# Altium PCB Time4CM4_Module.PcbDoc
Units mil, origin at the board's own origin, x right, y up, seen from the top; angles counter-clockwise.
Board outline 511.81 x 590.55 mil, 4 copper layers (Top Layer, Int1 (GND), Int2 (PWR), Bottom Layer), stack 61.418 mil thick; 2 components, 10 nets, 28 pads, 0 vias.
Unrouted connection lines stored in the file: 9.
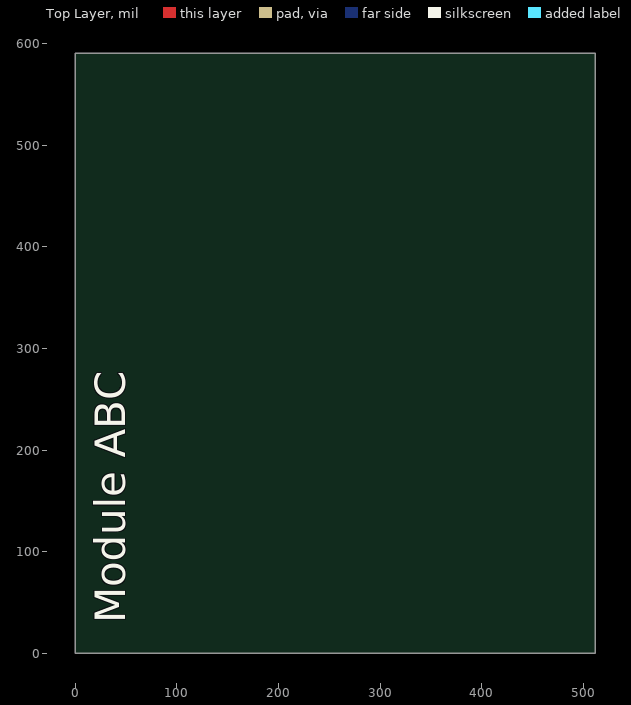
[diagram p0: Top Layer view]
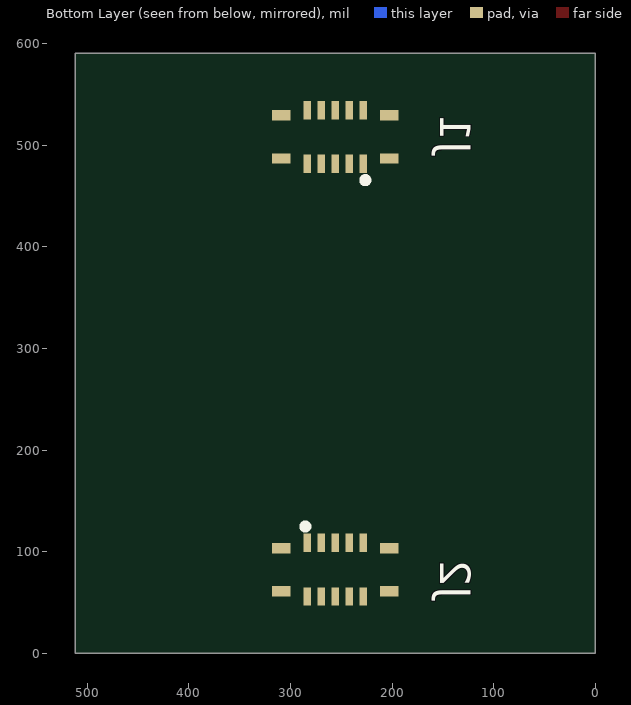
[diagram p1: Bottom Layer view, seen from below]
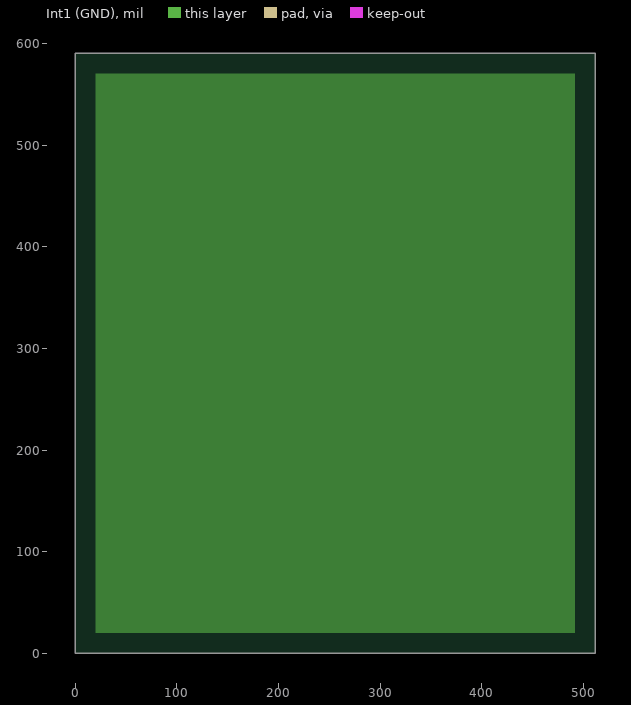
[diagram p2: Int1 (GND), clearances drawn from the general rule]
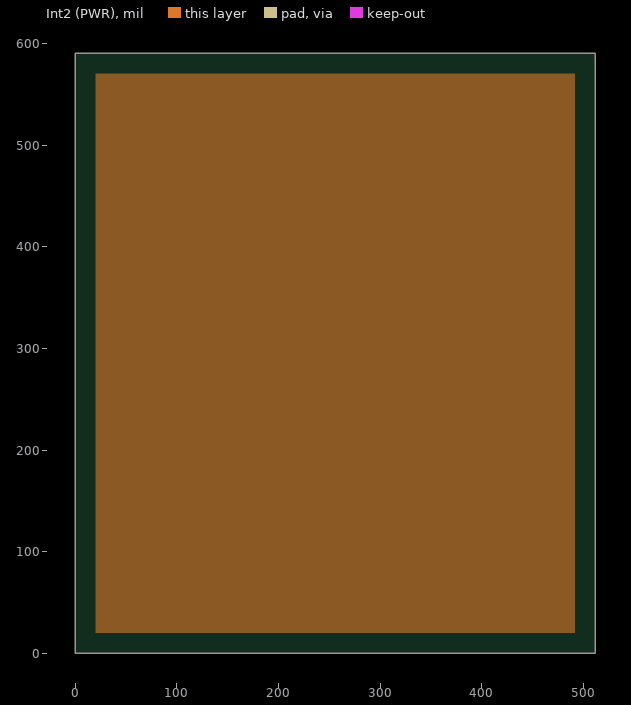
[diagram p3: Int2 (PWR), clearances drawn from the general rule]

## Layer stack, top to bottom
Top Solder: solder mask 1, SM-001, Dk 4
Top Layer: signal copper 1.378
Dielectric 1: prepreg 2.1654, PP-017, Dk 4.3
Dielectric 2: prepreg 2.1654, PP-017, Dk 4.3
Int1 (GND): plane copper 1.378
Dielectric 3: core 47.2441, Core-039, Dk 4.8
Int2 (PWR): plane copper 1.378
Dielectric 4: prepreg 2.1654, PP-017, Dk 4.3
Dielectric 5: prepreg 2.1654, PP-017, Dk 4.3
Bottom Layer: signal copper 1.378
Bottom Solder: solder mask 1, SM-001, Dk 4

## Board outline
0,0 0,590.55 511.81,590.55 511.81,0

## Design rules (kind name [scope] priority, off if disabled: settings)
Clearance [All] p1: gap=5 ignorepadtopadclearanceinfootprint=FALSE
PlaneClearance [All] p1: clearance=20
PlaneConnect [All] p1: planeconnectstyle=Relief reliefexpansion=20 reliefentries=4 reliefconductorwidth=10 reliefairgap=10
PolygonConnect [All] p1: connectstyle=Relief reliefconductorwidth=10 reliefentries=4 polygonreliefangle="90 Angle" airgapwidth=10
RoutingVias [All] p1: holewidth=28 width=50 viastyle="Through Hole" minholewidth=28 minwidth=50 maxholewidth=28 maxwidth=50
SolderMaskExpansion [All] p1: expansion=4 istentingtop=FALSE
Width [All] p1: maxlimit=10 minlimit=6 preferedwidth=10
28 further rules are at their usual default settings.

## Components (designator, comment, footprint, x,y, rotation, side; value= is the part's Value field where it differs from the comment)
J1 "BM23FR0.8-10DS-0.35V_895_" BM23FR0810DP035V895 255.91,508.27 r0 bottom locked
J2 "BM23FR0.8-10DS-0.35V_895_" BM23FR0810DP035V895 255.91,82.28 r180 bottom locked

## Footprints (in the part's own frame and the unit in brackets; to place one, negate y for a bottom-side part, rotate by r counter-clockwise, add the part's x,y. Pads: shape width x height; smd on the part's side, far side on the other; paste and mask are expansions set on the pad)
BM23FR0810DP035V895 [mm]
  rect 0.18x0.46 smd: 1(-0.7,0.67) 2(-0.7,-0.67) 3(-0.35,0.67) 4(-0.35,-0.67) 5(0,0.67) 6(0,-0.67) 7(0.35,0.67) 8(0.35,-0.67) 9(0.7,0.67) 10(0.7,-0.67)
  rect 0.47x0.26 smd: MP1(-1.35,0.54) MP2(-1.35,-0.54) MP3(1.35,0.54) MP4(1.35,-0.54)
  silkscreen extent -0.8,1.03 -0.7,1.13, body extent -1.73,-0.88 1.73,0.88, height 0.74

## Part data
J1 J2: "Connector", Manufacturer_Name=Hirose, Manufacturer_Part_Number=BM23FR0.8-10DS-0.35V(895), Mouser Part Number=798-3FR0810DS035V895, Datasheet Link=https://componentsearchengine.com/Datasheets/1/BM23FR0.8-10DS-0.35V(895).pdf, Height=0.9mm, Mouser Price/Stock=https://www.mouser.co.uk/ProductDetail/Hirose-Connector/BM23FR08-10DS-035V895/?qs=YCa%2FAAYMW01IXWgIGURT8A%3D%3D

## Nets (pads, with @x,y where several pads share a name; then routed paths per layer and width w, separated by ;. In a path a pad name is that pad's centre, name@x,y a point inside that pad or via, vN(x,y) a via of type N, cw(c..) or ccw(c..) an arc to the next point about the centre after c; other vN are vias at no path point)
1V8: J1.5
3V3: J1.1
5V: J1.7
GND: J1.3 J1.6 J1.MP1 J1.MP2 J1.MP3 J1.MP4 J2.MP1 J2.MP2 J2.MP3 J2.MP4
GPIO_1: J1.8
GPIO_2: J1.9
GPIO_3: J1.10
NetJ1_2: J1.2
NetJ1_4: J1.4
NetJ2_1: J2.1
pads on no net: J2.2 J2.3 J2.4 J2.5 J2.6 J2.7 J2.8 J2.9 J2.10

## Polygon pours and split planes (outlines as drawn)
no net on Int1 (GND) (split plane): 491.71,20.1 20.1,20.1 20.1,570.45 491.71,570.45
no net on Int2 (PWR) (split plane): 491.71,20.1 20.1,20.1 20.1,570.45 491.71,570.45

## Silkscreen, mask and mechanical layers (free items; w line width, h text height)
Top Overlay:
  text "Module ABC" at 49.12,29.62 h30 r90